# Altium PCB Arduino-DUE-V03.PcbDoc (part 2 of 2)
Units mil, origin at the board's own origin, x right, y up, seen from the top; angles counter-clockwise.
Board outline 4000 x 2100 mil, 2 copper layers (Top, Bottom), stack 65.748 mil thick; 128 components, 163 nets, 632 pads, 387 vias.
Unrouted connection lines stored in the file: 4.
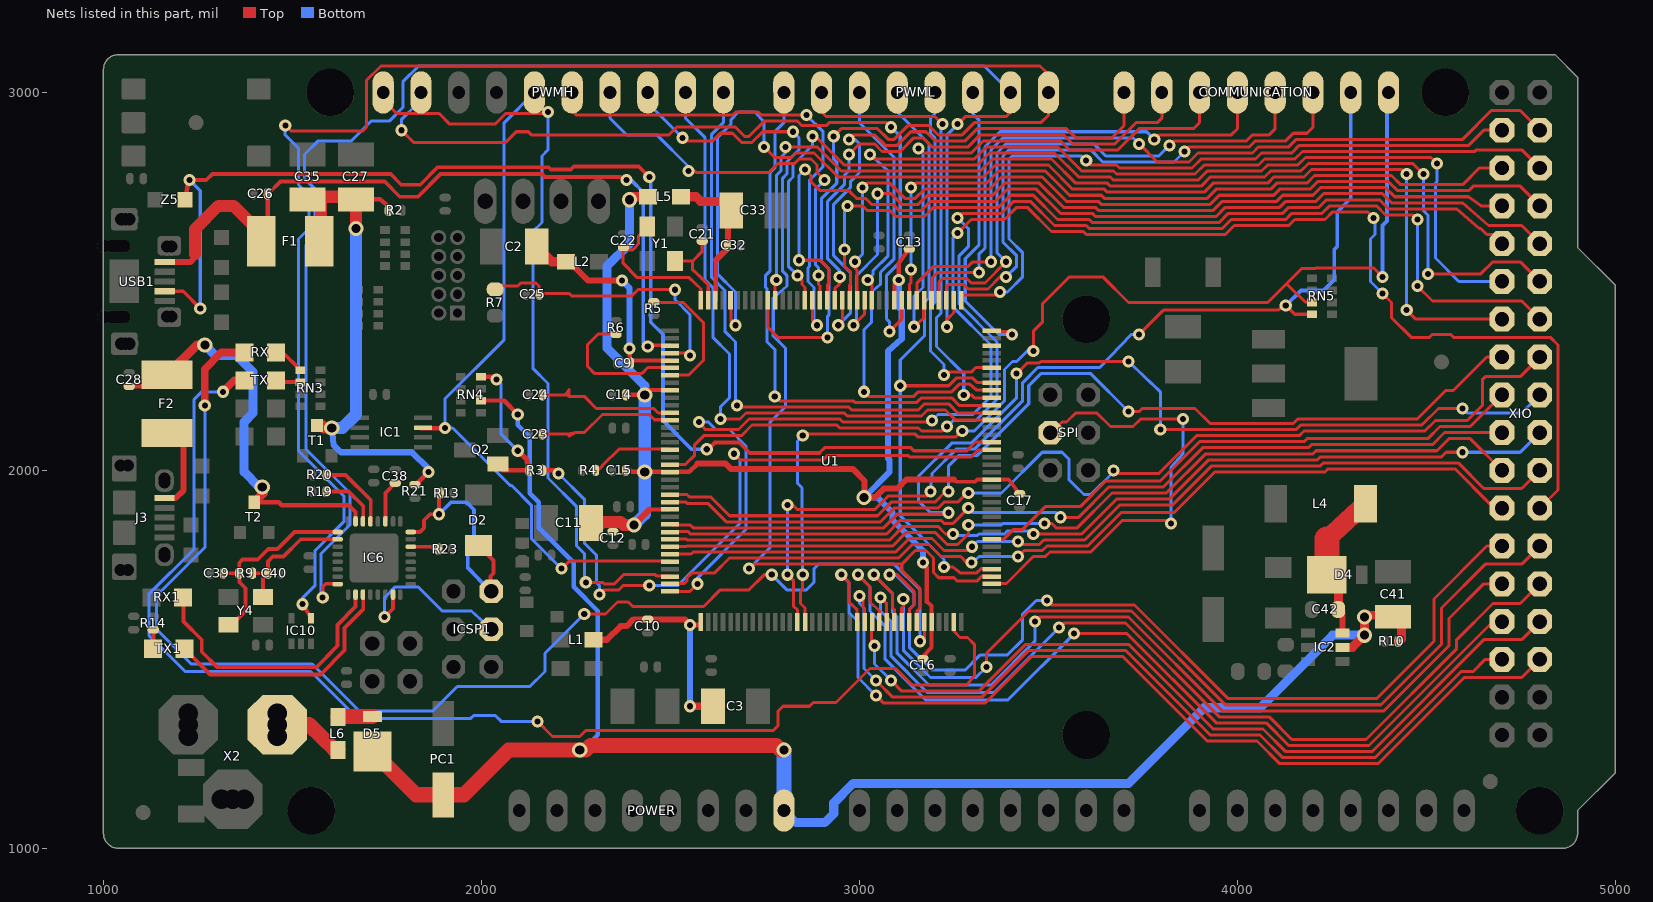
[diagram p2: the nets of this part, all layers, seen from the top]

## Via types
v1: diameter 32/32 (per signal layer), hole 16, Top to Bottom, 323 vias
v2: diameter 40/40 (per signal layer), hole 24, Top to Bottom, 64 vias

## Nets (pads, with @x,y where several pads share a name; then routed paths per layer and width w, separated by ;. In a path a pad name is that pad's centre, name@x,y a point inside that pad or via, vN(x,y) a via of type N, cw(c..) or ccw(c..) an arc to the next point about the centre after c; other vN are vias at no path point) (continued)
N$6: Q2.1 R3.2 RN4.8 | length 417.1
  Top w8: RN4.8@1999,2248 RN4.8@2000,2248
  Top w11: Q2.1@2044,2017 2040,2016 2056,2000 Q2.1@2068,2000
  Top w12: RN4.8@2000,2248 2032,2248 v1(2040,2240) ; Q2.1@2068,2000 2127,2000 R3.2@2128,2000
  Top w14: v1(2096,2052) 2119,2030 R3.2@2127,2000
  Bottom w8: v1(2040,2240) 2052,2228 2052,2096 v1(2096,2052)
N$7: R4.1 U1.53 | length 221.9
  Top w8: R4.1@2302,2000 2308,2000 2320,2012 2320,2014 2364,2056 2496,2056 U1.53@2500,2055
N$10: D5.P$2 L6.1 | length 92.2
  Top w40: L6.1@1620,1348 1622,1349 D5.P$2@1711.98,1349
N$11: R5.2 U1.43 | length 383.2
  Top w8: R5.2@2455.99,2446 R5.2@2447,2444 ; U1.43@2500,2252 2548,2252 2588,2292 2588,2390 2534,2444 R5.2@2447,2444 ; R5.2@2446,2444 R5.2@2447,2444 ; R5.2@2446,2444 R5.2@2447,2444 ; R5.2@2446,2444 R5.2@2447,2444 ; R5.2@2446,2444 R5.2@2447,2444 ; R5.2@2446,2444 R5.2@2447,2444 ; R5.2@2446,2444 R5.2@2447,2444 ; R5.2@2446,2444 R5.2@2447,2444 ; R5.2@2446,2444 R5.2@2447,2444
N$12: R6.2 U1.42 | length 378.9
  Top w8: R6.2@2356,2361 2309,2361 2280,2332 2280,2276 2300,2256 2424,2256 2440,2272 2496,2272 U1.42@2500,2272
N$14: R14.2 TX1.A | length 51.2
  Top w10: TX1.A@1131,1528 1132,1530 R14.2@1132,1579
N$54: RN3.1 RX.A | length 83.7
  Top w10: RX.A@1457,2312 1472,2314 RN3.1@1521,2266
N$55: RN3.2 TX.A | length 52
  Top w10: TX.A@1469,2234 RN3.2@1521,2234
PIN22: U1.1 XIO.3 | length 1885.9
  Top w8: U1.1@3270,2451 3268,2464 3364,2464 v1(3372,2472) ; v1(3600,2820) 3612,2808 3680,2808 3688,2800 3880,2800 3904,2824 4048,2824 4064,2840 4144,2840 4164,2860 4612,2860 4652,2900 XIO.3@4699.97,2900
  Bottom w8: v1(3372,2472) 3392,2472 3432,2512 3432,2576 3396,2612 3396,2824 3404,2832 3588,2832 v1(3600,2820)
PIN23: U1.7 XIO.4 | length 2129.2
  Top w8: U1.7@3152,2451 3152,2456 3152,2495 3197,2540 3288,2540 3300,2552 v1(3348,2552) ; v1(3740,2864) 3788,2816 3872,2816 3896,2840 4040,2840 4056,2856 4136,2856 4156,2876 4596,2876 4672,2952 4748,2952 XIO.4@4799.97,2900
  Bottom w8: v1(3348,2552) 3348,2848 3380,2880 3724,2880 v1(3740,2864)
PIN24: U1.8 XIO.5 | length 1963.7
  Top w8: U1.8@3132,2451 3132,2492 3136,2496 v1(3136,2532) ; v1(3136,2748) 3148,2760 3336,2760 3368,2792 3492,2792 3556,2728 3640,2728 3648,2720 3920,2720 3944,2744 4088,2744 4104,2760 4184,2760 4204,2780 4408,2780 4432,2756 4596,2756 4640,2800 XIO.5@4699.98,2800
  Bottom w8: v1(3136,2532) v1(3136,2748)
PIN25: U1.13 XIO.6 | length 2299.6
  Top w8: v1(3022,2504) 3033,2493 3033,2455 U1.13@3034,2451 ; v1(3028,2836) 3040,2824 3304,2824 3336,2856 3524,2856 3588,2792 3672,2792 3680,2784 3888,2784 3912,2808 4056,2808 4072,2824 4152,2824 4172,2844 4628,2844 4632,2848 4752,2848 XIO.6@4799.98,2800
  Bottom w8: v1(3022,2504) 3036,2518 3036,2528 3076,2568 3076,2792 v1(3028,2836)
PIN26: U1.14 XIO.7 | length 2213.3
  Top w8: v1(2984,2384) 3014,2414 U1.14@3014,2451 ; v1(3048,2732) 3084,2732 3112,2704 3156,2704 3180,2728 3352,2728 3384,2760 3476,2760 3540,2696 3624,2696 3632,2688 3936,2688 3960,2712 4104,2712 4120,2728 4200,2728 4220,2748 4392,2748 4416,2724 4612,2724 4644,2700 XIO.7@4699.98,2700
  Bottom w8: v1(2984,2384) 2992,2392 2992,2515 3048,2571 v1(3048,2732)
PIN27: U1.15 XIO.8 | length 2237
  Top w8: v1(2988,2552) 2988,2535 2994,2530 2994,2451 U1.15@2994,2450 ; v1(3008,2748) 3020,2760 3080,2760 3120,2720 3148,2720 3172,2744 3344,2744 3376,2776 3484,2776 3548,2712 3632,2712 3640,2704 3928,2704 3952,2728 4096,2728 4112,2744 4192,2744 4212,2764 4400,2764 4424,2740 4612,2740 4624,2752 4748,2752 XIO.8@4799.98,2700
  Bottom w8: v1(2988,2552) 3008,2572 v1(3008,2748)
PIN28: U1.16 XIO.9 | length 2132.2
  Top w8: v1(2960,2584) 2960,2540 2977,2524 2976,2520 2976,2492 2974,2490 2974,2449 U1.16@2975,2451 ; v1(2968,2700) 3008,2700 3020,2688 3080,2688 3096,2672 3172,2672 3196,2696 3368,2696 3400,2728 3460,2728 3524,2664 3608,2664 3616,2656 3952,2656 3976,2680 4120,2680 4136,2696 4216,2696 4236,2716 4376,2716 4400,2692 4580,2692 4640,2640 4644,2640 4660,2624 4676,2624 XIO.9@4699.98,2600
  Bottom w8: v1(2960,2584) 2960,2692 v1(2968,2700)
PIN29: U1.19 XIO.10 | length 2547.7
  Top w8: v1(2840,2556) 2896,2556 2920,2532 2920,2496 2916,2492 U1.19@2916,2451 ; v1(2856,2796) 2872,2780 2872,2764 2896,2740 2972,2740 2992,2720 3016,2720 3032,2704 3088,2704 3104,2688 3164,2688 3188,2712 3360,2712 3392,2744 3468,2744 3532,2680 3616,2680 3624,2672 3944,2672 3968,2696 4112,2696 4128,2712 4208,2712 4228,2732 4384,2732 4408,2708 4596,2708 4664,2648 4752,2648 XIO.10@4799.98,2600
  Bottom w8: v1(2840,2556) 2840,2780 v1(2856,2796)
PIN30: U1.22 XIO.11 | length 2698.7
  Top w8: v1(2836,2516) 2848,2504 2848,2492 2856,2484 U1.22@2856,2448 ; v1(2876,2884) 2884,2884 2960,2808 3312,2808 3344,2840 3516,2840 3580,2776 3664,2776 3672,2768 3896,2768 3920,2792 4064,2792 4080,2808 4160,2808 4180,2828 4512,2828 v1(4528,2812) ; U1.22@2856,2448 2857,2451 2857,2449 U1.22@2856,2448
  Bottom w8: v1(2836,2516) 2812,2540 2812,2764 2824,2776 2824,2808 2876,2860 v1(2876,2884) ; v1(4528,2812) 4528,2764 4524,2760 4524,2562 4586,2500 XIO.11@4699.99,2500
PIN31: U1.26 XIO.12 | length 2810
  Top w8: U1.26@2778,2451 2777,2461 2777,2501 v1(2780,2504) ; v1(2804,2856) 2888,2856 2952,2792 3320,2792 3352,2824 3508,2824 3572,2760 3656,2760 3664,2752 3904,2752 3928,2776 4072,2776 4088,2792 4168,2792 4188,2812 4464,2812 v1(4492,2784) ; v1(4504,2520) 4644,2520 4676,2552 4748,2552 XIO.12@4799.99,2500
  Bottom w8: v1(2780,2504) 2780,2780 2792,2792 2792,2828 2804,2840 v1(2804,2856) ; v1(4492,2784) 4492,2688 4504,2676 v1(4504,2520)
PIN32: U1.32 XIO.13 | length 3265.6
  Top w8: U1.32@2660,2451 2660,2397 v1(2672,2384) ; v1(2748,2856) 2776,2828 2820,2828 2832,2840 2880,2840 2944,2776 3328,2776 3360,2808 3500,2808 3564,2744 3648,2744 3656,2736 3912,2736 3936,2760 4080,2760 4096,2776 4176,2776 4196,2796 4436,2796 v1(4448,2784) ; v1(4448,2424) 4472,2400 XIO.13@4699.99,2400 XIO.13@4704,2400
  Bottom w8: v1(2672,2384) 2672,2472 2624,2520 2624,2880 2660,2916 2660,2928 2680,2948 2724,2948 2748,2920 v1(2748,2856) ; v1(4448,2424) v1(4448,2784)
PIN33: U1.55 XIO.14 | length 3348.1
  Top w8: U1.55@2500,2016 2504,2016 2540,2016 2564,2040 2564,2068 2588,2092 2688,2092 2716,2120 2940,2120 2948,2112 3156,2112 3164,2104 3220,2104 v1(3232,2116) ; v1(3260,2668) 3272,2680 3376,2680 3408,2712 3452,2712 3516,2648 3600,2648 3608,2640 3960,2640 3984,2664 4128,2664 4144,2680 4224,2680 4244,2700 4368,2700 4392,2676 4464,2676 v1(4476,2664) ; v1(4476,2488) 4516,2448 4752,2448 XIO.14@4799.99,2400
  Bottom w8: v1(3232,2116) 3248,2132 3308,2132 3364,2188 3364,2340 3264,2440 3264,2568 3288,2592 3288,2640 v1(3260,2668) ; v1(4476,2488) v1(4476,2664)
PIN34: U1.59 XIO.15 | length 2581.2
  Top w8: U1.59@2500,1937 2504,1936 2544,1936 2550,1930 2606,1930 2656,1880 3048,1880 3084,1916 3200,1916 3228,1944 v1(3236,1944) ; v1(3712,2156) 3740,2156 3748,2164 3888,2164 3928,2124 4148,2124 4160,2136 4476,2136 4552,2212 4572,2212 4660,2300 XIO.15@4699.99,2300
  Bottom w8: v1(3236,1944) 3236,2012 3264,2040 3312,2040 3448,2176 3448,2224 3480,2256 3612,2256 v1(3712,2156)
PIN35: U1.60 XIO.16 | length 2676.1
  Top w8: U1.60@2500,1917 2540,1917 2544,1912 2600,1912 2648,1864 3056,1864 3092,1900 3208,1900 3224,1916 3260,1916 3284,1940 v1(3288,1940) ; v1(3672,2000) 3680,1992 3792,1992 3892,2092 4164,2092 4176,2104 4496,2104 4524,2132 4608,2132 4648,2172 4648,2240 4656,2248 4748,2248 XIO.16@4799.99,2300
  Bottom w8: v1(3288,1940) 3376,1940 3484,2048 3536,2048 3554,2030 3554,1976 3575,1955 3594,1936 3612,1936 3672,1996 v1(3672,2000)
PIN36: U1.116 XIO.17 | length 1508.2
  Top w8: U1.116@3351,1819 3351,1818 3354,1818 3382,1818 3408,1844 3432,1844 3492,1904 3584,1904 3652,1972 3796,1972 3900,2076 4176,2076 4184,2084 4504,2084 4536,2116 4616,2116 XIO.17@4700,2200
PIN37: U1.63 XIO.18 | length 2901.1
  Top w8: U1.63@2500,1858 2504,1856 2552,1856 2560,1848 3064,1848 3100,1884 3232,1884 v1(3236,1888) ; v1(3416,2256) 3444,2284 3476,2284 3480,2288 v1(3712,2288) ; v1(3796,2108) 4156,2108 4168,2120 4488,2120 4532,2164 v1(4596,2164)
  Bottom w8: v1(3236,1888) 3188,1888 3156,1920 3156,1984 3244,2072 3296,2072 3416,2192 v1(3416,2256) ; v1(3712,2288) 3796,2208 v1(3796,2108) ; v1(4596,2164) 4608,2152 4752,2152 XIO.18@4800,2200
PIN38: U1.64 XIO.19 | length 2340.3
  Top w8: U1.64@2500,1838 2547,1838 2552,1832 3072,1832 3108,1868 3216,1868 3224,1860 3248,1860 v1(3288,1900) ; v1(3532,1876) 3580,1876 3660,1956 3804,1956 3908,2060 4188,2060 4196,2068 4516,2068 4548,2100 XIO.19@4700,2100
  Bottom w8: v1(3288,1900) 3300,1888 3520,1888 v1(3532,1876)
PIN39: U1.65 XIO.20 | length 2445.8
  Top w8: U1.65@2500,1819 2542,1819 2544,1816 3080,1816 3116,1852 3208,1852 3228,1832 v1(3248,1832) ; v1(3460,1832) 3588,1832 3680,1924 3820,1924 3924,2028 4212,2028 4220,2036 4540,2036 4552,2048 v1(4596,2048)
  Bottom w8: v1(3248,1832) 3252,1832 3256,1828 3312,1828 3316,1832 3384,1832 3392,1840 3452,1840 v1(3460,1832) ; v1(4596,2048) 4748,2048 XIO.20@4800,2100
PIN40: U1.66 XIO.21 | length 2403.4
  Top w8: U1.66@2500,1799 2543,1799 2544,1800 3088,1800 3124,1836 3200,1836 3232,1804 3260,1804 3288,1832 v1(3288,1856) ; v1(3490,1860) 3508,1860 3520,1848 3576,1848 3668,1940 3812,1940 3916,2044 4200,2044 4208,2052 4528,2052 4560,2084 4616,2084 XIO.21@4700.01,2000
  Bottom w8: v1(3288,1856) 3376,1856 3380,1860 v1(3490,1860)
PIN41: U1.67 XIO.22 | length 2481
  Top w8: U1.67@2500,1779 2555,1779 2560,1784 3096,1784 3132,1820 3192,1820 3224,1788 3288,1788 v1(3298,1798) ; v1(3420,1812) 3428,1804 3476,1804 3488,1816 3596,1816 3688,1908 3828,1908 3932,2012 4220,2012 4228,2020 4584,2020 4652,1952 4752,1952 XIO.22@4800.01,2000
  Bottom w8: v1(3298,1798) 3312,1812 v1(3420,1812)
PIN42: U1.71 XIO.23 | length 2412
  Top w8: U1.71@2500,1701 2537,1701 2544,1708 2544,1716 2556,1728 2616,1728 2656,1768 3104,1768 3140,1804 3184,1804 3216,1772 3268,1772 3284,1756 v1(3296,1756) ; v1(3420,1772) 3436,1788 3484,1788 3496,1800 3604,1800 3692,1888 3832,1888 3940,1996 4232,1996 4240,2004 4576,2004 4668,1912 4688,1912 XIO.23@4700.01,1900
  Bottom w8: v1(3296,1756) 3316,1772 v1(3420,1772)
PIN43: U1.72 XIO.24 | length 4370.6
  Top w8: U1.72@2500,1681 2496,1680 2552,1680 v1(2572,1700) ; v1(2576,2128) 2592,2108 2680,2108 2708,2136 2948,2136 2956,2128 3188,2128 v1(3192,2132) ; v1(3260,2628) 3296,2664 3384,2664 3416,2696 3444,2696 3508,2632 3592,2632 3600,2624 3968,2624 3992,2648 4136,2648 4152,2664 4232,2664 4252,2684 4344,2684 v1(4360,2668) ; v1(4384,2468) 4408,2444 4408,2404 4460,2352 4508,2352 4516,2360 4564,2360 4572,2352 4828,2352 4848,2332 4848,1948 XIO.24@4800.01,1900
  Bottom w8: v1(2572,1700) 2572,1716 2700,1844 2700,2064 2656,2108 2620,2108 2600,2128 v1(2576,2128) ; v1(3192,2132) 3208,2148 3300,2148 3348,2196 3348,2332 3248,2432 3248,2616 v1(3260,2628) ; v1(4360,2668) 4364,2664 4364,2624 4352,2612 4352,2500 v1(4384,2468)
PIN44: U1.101 XIO.25 | length 2449.6
  Top w8: v1(3080,1724) 3100,1724 3144,1680 3144,1644 3132,1632 U1.101@3132,1600 ; v1(3496,1656) 3508,1644 3728,1644 3976,1396 4368,1396 4520,1548 4520,1660 4660,1800 XIO.25@4700.01,1800
  Bottom w8: v1(3080,1724) 3096,1724 3144,1676 3144,1644 3132,1632 3132,1532 3192,1472 3280,1472 3320,1512 3392,1512 3432,1552 3432,1620 3468,1656 v1(3496,1656)
PIN45: U1.100 XIO.26 | length 2339.4
  Top w8: U1.100@3113,1600 3112,1600 3112,1636 3116,1640 v1(3116,1660) ; v1(3336,1480) 3336,1516 3448,1628 3720,1628 3968,1380 4380,1380 4540,1540 4540,1636 4656,1752 4752,1752 XIO.26@4800.01,1800
  Bottom w8: v1(3116,1660) 3116,1524 3188,1452 3308,1452 v1(3336,1480)
PIN46: U1.99 XIO.27 | length 2404.7
  Top w8: v1(3038,1724) 3088,1674 3088,1636 3093,1632 U1.99@3093,1600 ; v1(3464,1600) 3476,1612 3712,1612 3960,1364 4388,1364 4560,1536 4560,1608 4652,1700 XIO.27@4700.02,1700
  Bottom w8: v1(3038,1724) 3088,1674 3088,1624 3100,1612 3100,1516 3184,1432 3348,1432 3464,1548 v1(3464,1600)
PIN47: U1.98 XIO.28 | length 2383.5
  Top w8: v1(3056,1664) 3072,1648 3072,1600 U1.98@3073,1600 ; v1(3528,1584) 3540,1596 3704,1596 3952,1348 4084,1348 4144,1288 4340,1288 4580,1528 4580,1552 4676,1648 4748,1648 XIO.28@4800.02,1700
  Bottom w8: v1(3056,1664) 3056,1628 3084,1600 3084,1508 3180,1412 3356,1412 v1(3528,1584)
PIN48: U1.97 XIO.29 | length 2409.8
  Top w8: v1(2996,1724) 3028,1692 3028,1652 3053,1628 U1.97@3053,1600 ; v1(3568,1568) 3708,1568 3944,1332 4076,1332 4136,1272 4348,1272 4676,1600 XIO.29@4700.02,1600
  Bottom w8: v1(2996,1724) 3028,1692 3028,1628 3068,1588 3068,1500 3176,1392 3392,1392 v1(3568,1568)
PIN49: U1.96 XIO.30 | length 2216.9
  Top w8: U1.96@3034,1600 3032,1592 3032,1544 v1(3040,1536) ; v1(3084,1444) 3112,1416 3316,1416 3440,1540 3712,1540 3936,1316 4068,1316 4128,1256 4356,1256 4652,1552 4752,1552 XIO.30@4800.02,1600
  Bottom w8: v1(3040,1536) 3040,1488 v1(3084,1444)
PIN50: U1.95 XIO.31 | length 2266.6
  Top w8: v1(3000,1668) 3010,1659 3010,1639 3013,1635 U1.95@3014,1600 ; v1(3044,1444) 3088,1400 3324,1400 3448,1524 3704,1524 3928,1300 4060,1300 4120,1240 4364,1240 4592,1468 4624,1468 4656,1500 XIO.31@4700.02,1500
  Bottom w8: v1(3000,1668) 3000,1648 3012,1636 3012,1476 v1(3044,1444)
PIN51: U1.94 XIO.32 | length 2548.4
  Top w8: v1(2952,1724) 2972,1704 2972,1652 2994,1631 2994,1600 U1.94@2993,1600 ; v1(3044,1404) 3064,1384 3332,1384 3456,1508 3696,1508 3920,1284 4052,1284 4112,1224 4372,1224 4600,1452 4752,1452 XIO.32@4800.02,1500
  Bottom w8: v1(2952,1724) 2972,1704 2972,1624 2996,1600 2996,1452 v1(3044,1404)
PWM2: PWML.3 U1.144 | length 808.6
  Top w8: U1.144@3351,2370 3344,2368 3396,2368 v1(3404,2360)
  Bottom w8: PWML.3@3300,3004 PWML.3@3300,3000.03 3300,2944 3316,2928 3316,2596 3280,2560 3280,2448 3368,2360 v1(3404,2360)
PWM3: PWML.4 U1.139 | length 913.1
  Top w8: v1(3224,2252) 3232,2260 3296,2260 3308,2272 3344,2272 U1.139@3351,2272
  Bottom w8: PWML.4@3200,3000.01 3200,2944 3188,2932 3188,2892 3200,2880 3200,2444 3188,2432 3188,2316 3224,2280 v1(3224,2252)
PWM5: PWML.6 U1.136 | length 1227.4
  Top w8: v1(3012,2208) 3024,2196 3144,2196 3156,2208 3244,2208 3264,2228 3292,2228 3309,2213 U1.136@3351,2213
  Bottom w8: PWML.6@3000,2999.97 3000,2920 3092,2828 3092,2560 3056,2524 3056,2492 3032,2472 3032,2392 3012,2372 v1(3012,2208)
PWM6: PWML.7 U1.135 | length 1215.5
  Top w8: PWML.7@2900,2999.96 2900,2949 2913,2936 3200,2936 v1(3220,2916) ; v1(3276,2200) 3296,2200 3304,2192 3344,2192 U1.135@3351,2193
  Bottom w8: v1(3220,2916) 3216,2912 3216,2416 3204,2404 3204,2328 3276,2256 v1(3276,2200)
PWM7: PWML.8 U1.134 | length 1429.1
  Top w8: v1(2776,2196) 2788,2184 2984,2184 2988,2180 3152,2180 3164,2192 3244,2192 3264,2172 3348,2172 3349,2173 U1.134@3351,2173
  Bottom w8: v1(2776,2196) 2776,2320 2756,2340 2756,2480 2752,2484 2752,2516 2764,2528 2764,2788 2776,2800 2776,2896 2800,2920 PWML.8@2800,3000
PWM8: PWMH.1 U1.133 | length 1566
  Top w8: v1(2676,2172) 2680,2168 2972,2168 2980,2160 3156,2160 3172,2176 3236,2176 3260,2152 3344,2152 U1.133@3351,2153
  Bottom w8: PWMH.1@2640,3000 2640,2920 2608,2888 2608,2512 2644,2476 2644,2368 2672,2340 2672,2176 v1(2676,2172)
PWM9: PWMH.2 U1.132 | length 1668.9
  Top w8: v1(2632,2136) 2684,2136 2700,2152 2960,2152 2968,2144 3164,2144 3180,2160 3228,2160 3255,2133 3336,2133 3340,2134 U1.132@3351,2134
  Bottom w8: PWMH.2@2540,3000 2540,2932 2592,2880 2592,2504 2612,2484 2612,2352 2656,2308 2656,2192 2632,2168 v1(2632,2136)
PWM11: PWMH.4 U1.20 | length 1084.4
  Top w8: v1(2548,2792) 2564,2792 2568,2788 2760,2788 2784,2812 2828,2812 2840,2824 2872,2824 2888,2808 2888,2788 v1(2908,2768) ; v1(2892,2516) 2892,2492 2896,2488 2896,2456 U1.20@2896,2451
  Bottom w8: PWMH.4@2340,3000.03 2340,2932 2384,2888 2464,2888 2548,2804 v1(2548,2792) ; v1(2892,2516) 2892,2536 2884,2544 2884,2744 v1(2908,2768)
PWM12: PWMH.5 U1.21 | length 1352
  Top w8: PWMH.5@2240,3000.01 2240,2952 2252,2940 2664,2940 2672,2948 2732,2948 2740,2940 v1(2860,2940) ; U1.21@2876,2451 2876,2397 v1(2888,2384)
  Bottom w8: v1(2860,2940) 2904,2896 2904,2804 2868,2768 2868,2540 2864,2536 2864,2500 2880,2484 2880,2392 v1(2888,2384)
PWM13: IC1.3 PWMH.6 U1.68 | length 1865.8
  Top w8: IC1.3@1840,2112 IC1.3@1846,2113 ; v1(2212,1740) 2232,1760 2409,1760 2412,1760 U1.68@2500,1760
  Top w12: IC1.3@1840,2112 v1(1904,2112)
  Bottom w8: PWMH.6@2140,2999.99 2060,2920 2060,2346 1904,2190 v1(1904,2112) 1924,2112 2076,1960 2080,1960 2132,1908 2132,1820 v1(2212,1740)
RD+: IC6.29 R20.1 | length 201
  Top w10: R20.1@1590,1988 1640,1988 1707,1922 IC6.29@1707,1865
RD-: IC6.30 R19.1 | length 156.3
  Top w10: R19.1@1590,1944 1590,1946 1592,1944 1648,1944 1687,1906 IC6.30@1687,1865
RESET2: D2.A IC6.24 ICSP1.5 R13.1 | length 670.3
  Top w10: IC6.24@1813,1837 1837,1837 1848,1848 1848,1868 1864,1884 v1(1888,1884) 1888,1939 R13.1@1891,1940 ; D2.A@1992,1802 2032,1762 2032,1728 2024,1720 2024,1680 ICSP1.5@2025.97,1680.02
  Bottom w10: v1(1888,1884) 1920,1916 1960,1916 1980,1896 1980,1816 1964,1800 1964,1742 ICSP1.5@2020,1684 ; ICSP1.5@2022,1682 ICSP1.5@2025.97,1680.02
  Bottom w12: ICSP1.5@2020,1684 ICSP1.5@2022,1682
RESET_CMD: IC6.22 R23.1 | length 74.8
  Top w10: IC6.22@1813,1798 1865,1798 R23.1@1887,1792
RX: IC10.4 PWML.1 U1.27 | length 5170.3
  Top w8: v1(1481,2913) 1496,2898 1686,2898 1696,2908 1696,3032 1734,3070 3478,3070 3500,3048 3500,3000 3500,2940 3480,2920 3304,2920 3272,2888 3208,2888 3184,2912 3128,2912 3092,2876 3076,2876 3048,2904 2952,2904 v1(2932,2884) ; U1.27@2758,2451 2758,2379 2784,2352 v1(2916,2352)
  Top w10: v1(1527,1646) 1550,1609 IC10.4@1548,1609
  Bottom w8: v1(1481,2913) 1480,2913 1480,2888 1516,2852 1516,2756 1544,2728 1544,2640 1516,2612 1516,2052 1636,1932 1636,1864 1560,1788 1560,1696 1527,1663 v1(1527,1646) ; v1(2916,2352) 2916,2408 2920,2412 2920,2532 2900,2552 2900,2720 2940,2760 2940,2816 2932,2824 v1(2932,2884)
RXD0: COMMUNICATION.2 U1.18 | length 1418.9
  Top w8: U1.18@2935,2451 2935,2481 2948,2494 v1(2948,2512) ; v1(2972,2836) 3000,2864 3040,2864 3060,2844 3108,2844 3144,2880 3168,2880 3192,2856 3288,2856 3320,2888 3540,2888 3564,2864 3676,2864 3732,2920 3788,2920 3800,2932 COMMUNICATION.2@3800,3000
  Bottom w8: v1(2948,2512) 2948,2528 2916,2560 2916,2712 2960,2756 2960,2780 2972,2792 v1(2972,2836)
RXD1: COMMUNICATION.4 U1.5 | length 1327.1
  Top w8: U1.5@3191,2451 3192,2456 3192,2509 3208,2524 v1(3316,2524) ; v1(3780,2876) 3792,2888 3984,2888 4000,2904 COMMUNICATION.4@4000,3000
  Bottom w8: v1(3316,2524) 3316,2572 3332,2588 3332,2856 3372,2896 3760,2896 v1(3780,2876)
RXD2: COMMUNICATION.6 U1.3 | length 1529.8
  Top w8: U1.3@3231,2451 3231,2487 3236,2492 3276,2492 3288,2480 3340,2480 3372,2512 v1(3388,2512) ; v1(3860,2844) 3872,2856 4032,2856 4048,2872 4128,2872 4148,2892 4184,2892 4200,2908 COMMUNICATION.6@4200,3000
  Bottom w8: v1(3388,2512) 3416,2540 3416,2568 3380,2604 3380,2832 3396,2848 3612,2848 3644,2816 3832,2816 v1(3860,2844)
RXL: RX.C U1.103 | length 3450.3
  Top w8: v1(2272,1620) 2328,1620 2360,1652 2388,1652 2400,1640 2588,1640 2632,1684 2708,1684 2748,1724 v1(2768,1724) ; v1(3160,1548) 3172,1556 U1.103@3172,1600
  Top w20: v1(1268,2172) 1268,2268 1312,2312 RX.C@1374,2312
  Bottom w8: v1(1268,2172) 1268,1796 1140,1668 1140,1580 1232,1488 1552,1488 1676,1364 1872,1364 1936,1428 2128,1428 2168,1468 2168,1516 v1(2272,1620) ; v1(2768,1724) 2808,1684 2860,1684 2880,1704 2880,1740 2892,1752 3092,1752 3160,1684 v1(3160,1548)
RXL-U2: IC6.10 RX1.C | length 719
  Top w10: RX1.C@1210,1664 1212,1650 1212,1600 1260,1552 1260,1520 1300,1480 1564,1480 1591,1507 1591,1508 1619,1536 1619,1591 1667,1640 IC6.10@1667,1672
SCK2: IC6.15 ICSP1.3 | length 460
  Top w10: v1(1744,1612) 1766,1634 IC6.15@1766,1672
  Bottom w8: v1(1744,1612) 1744,1664 1772,1692 1832,1692 1896,1628 1974,1628 ICSP1.3@2026,1580.02
SCL0-3: COMMUNICATION.8 RN5.7 U1.87 | length 2991.3
  Top w8: v1(2850,1724) 2850,1686 2844,1680 2844,1648 2856,1636 2856,1600 U1.87@2857,1600 ; v1(2850,2092) 2854,2096 3148,2096 3156,2088 3254,2088 v1(3272,2104) ; v1(3460,2316) 3460,2368 3484,2392 3484,2440 3556,2512 3644,2512 3712,2444 4080,2444 4130,2494 ; RN5.7@4198,2445 4180,2445 4130,2494 ; v1(4384,2512) 4360,2536 4208,2536 4206,2534 4170,2534 4130,2494
  Bottom w8: v1(2850,1724) 2848,1954 2836,1966 2836,2078 v1(2850,2092) ; v1(3272,2104) 3304,2104 3384,2184 3384,2267 3405,2288 3416,2288 3444,2316 v1(3460,2316)
  Bottom w10: v1(4384,2512) 4384,2648 4396,2660 4396,2996 COMMUNICATION.8@4400,3000
SCL1: PWMH.10 U1.70 | length 2055.6
  Top w8: PWMH.10@1740,3000 1740,2980 1776,2944 1888,2944 1916,2916 2036,2916 2064,2944 2172,2944 v1(2176,2948) ; v1(2276,1704) 2320,1704 2324,1700 2352,1700 2376,1724 2460,1724 2464,1720 2500,1720 U1.70@2496,1720
  Bottom w8: v1(2176,2948) 2176,2848 2160,2832 2160,2656 2136,2632 2136,2270 2176,2230 2176,1980 2252,1904 2252,1800 2272,1780 2272,1708 v1(2276,1704)
SDA0-3: COMMUNICATION.7 RN5.8 U1.86 | length 2675
  Top w8: v1(2810,1724) 2826,1708 2826,1640 2836,1631 U1.86@2836,1604 ; v1(2810,1908) 2824,1908 2836,1896 3040,1896 3076,1932 3180,1932 v1(3188,1944) ; U1.86@2837,1600 U1.86@2836,1604 ; U1.86@2838,1600 U1.86@2836,1604 ; v1(3740,2360) 3804,2424 4108,2424 4120,2436 v1(4128,2436)
  Top w10: v1(4128,2436) 4152,2413 RN5.8@4198,2413
  Bottom w8: v1(2810,1724) v1(2810,1908) ; v1(3188,1944) 3192,1992 3256,2056 3304,2056 3432,2184 3432,2232 3472,2272 3636,2272 3720,2360 v1(3740,2360)
  Bottom w10: v1(4128,2436) 4168,2476 4228,2476 4256,2504 4256,2584 4264,2592 4264,2684 4300,2720 COMMUNICATION.7@4300,3000
SDA1: PWMH.9 U1.9 | length 2160
  Top w8: v1(1788,2900) 1820,2868 2064,2868 2092,2896 2124,2896 2132,2888 2496,2888 2516,2908 2672,2908 2696,2884 2708,2884 2748,2924 2836,2924 2848,2912 2912,2912 2920,2920 3072,2920 v1(3084,2908) ; v1(3080,2368) 3112,2400 3112,2448 U1.9@3113,2451
  Bottom w8: v1(1788,2900) 1788,2928 1828,2968 1828,2992 1832,2996 PWMH.9@1840,3000 ; v1(3080,2368) 3080,2392 3072,2400 3072,2516 3108,2552 3108,2884 v1(3084,2908)
SPCK: SPI.3 U1.110 | length 1228.6
  Top w8: U1.110@3351,1701 3389,1701 3460,1772 3492,1772 3504,1784 3612,1784 3696,1868 3816,1868 v1(3824,1860) ; SPI.3@3505,2100 3536,2128 3548,2128 3572,2152 3628,2152 3664,2116 3724,2116 3744,2136 v1(3856,2136)
  Bottom w8: v1(3824,1860) 3824,2008 3856,2044 v1(3856,2136)
SS0/PWM10: PWMH.3 U1.102 U1.111 | length 2638.3
  Top w8: v1(2532,2880) 2536,2872 2612,2872 2632,2892 2664,2892 2688,2868 2716,2868 2744,2896 v1(2824,2896) ; v1(2708,1740) 2720,1752 3112,1752 ; U1.102@3152,1600 3152,1628 3160,1636 3160,1688 3112,1736 3112,1752 ; U1.111@3351,1720 3344,1720 3324,1720 3312,1708 3258,1708 3250,1716 3210,1716 3196,1730 3196,1768 3176,1788 3148,1788 3112,1752
  Bottom w8: PWMH.3@2440,3000.04 2440,2972 v1(2532,2880) ; v1(2708,1740) 2764,1796 2764,2128 2804,2168 2804,2324 2772,2356 2772,2456 2808,2488 2808,2516 2796,2528 2796,2772 2808,2784 2808,2816 2840,2848 2840,2880 v1(2824,2896)
SS1/PWM4: PWML.5 U1.112 U1.137 | length 1766.2
  Top w8: v1(3108,2224) 3236,2224 3256,2244 3300,2244 3312,2232 3344,2232 U1.137@3351,2232 ; v1(3224,1744) 3248,1744 3268,1728 3309,1728 3322,1740 U1.112@3351,1740
  Bottom w8: PWML.5@3100,2999.99 3104,3000 3104,2944 3184,2864 3184,2456 3172,2444 3172,2356 3108,2292 v1(3108,2224) 3108,1880 3224,1764 v1(3224,1744)
SS3: U1.142
SW: C42.2 D4.P$1 IC2.6 L4.P$1 | length 410.5
  Top w16: D4.P$1@4237,1724 D4.P$1@4267,1706 ; C42.2@4267,1632 4278,1626 IC2.6@4278,1570
  Top w24: C42.2@4267,1632 D4.P$1@4267,1706
  Top w50: 4237,1819 L4.P$1@4339,1912
  Top w66: D4.P$1@4237,1724 4237,1819
TX: IC6.8 PWML.2 U1.2 | length 4211.1
  Top w8: v1(3232,2380) 3232,2383 3232,2400 3250,2418 U1.2@3250,2451 ; v1(3260,2916) 3280,2936 3388,2936 3400,2948 PWML.2@3400,3000.04
  Top w10: v1(1580,1664) 1580,1692 1588,1700 IC6.8@1620,1700
  Bottom w8: v1(1580,1664) 1576,1668 1576,1780 1652,1856 1652,1940 1536,2056 1536,2596 1560,2620 1560,2744 1532,2772 1532,2836 1568,2872 1656,2872 1708,2924 1756,2924 1792,2960 1792,3028 1834,3070 3330,3070 PWML.2@3400,3000.04 ; v1(3232,2380) 3232,2888 v1(3260,2916)
TXD0: COMMUNICATION.1 U1.17 | length 1538.4
  Top w8: v1(2944,2384) 2955,2394 U1.17@2955,2451 ; v1(2972,2876) 2984,2888 3040,2888 3068,2860 3100,2860 3136,2896 3176,2896 3200,2872 3280,2872 3312,2904 3548,2904 3572,2880 3668,2880 3700,2912 COMMUNICATION.1@3700,3000
  Bottom w8: v1(2944,2384) 2976,2416 2976,2524 2932,2568 2932,2704 2976,2748 2976,2764 3000,2788 3000,2864 2988,2876 v1(2972,2876)
TXD1: COMMUNICATION.3 U1.6 | length 1453.4
  Top w8: v1(3144,2380) 3170,2402 3170,2450 3171,2451 U1.6@3172,2451 ; v1(3156,2852) 3168,2840 3296,2840 3328,2872 3532,2872 3556,2848 3684,2848 3740,2904 3884,2904 3900,2920 COMMUNICATION.3@3900,3000
  Bottom w8: v1(3144,2380) 3144,2460 3168,2484 3168,2840 v1(3156,2852)
TXD2: COMMUNICATION.5 U1.4 | length 1439.9
  Top w8: U1.4@3211,2451 3211,2499 3220,2508 3284,2508 3296,2496 3332,2496 v1(3388,2552) ; v1(3820,2860) 3832,2872 4024,2872 4040,2888 4084,2888 4100,2904 COMMUNICATION.5@4100,3000
  Bottom w8: v1(3388,2552) 3364,2576 3364,2840 3388,2864 3620,2864 3652,2832 3792,2832 v1(3820,2860)
TXL: TX.C U1.107 | length 3434.1
  Top w8: v1(2148,1336) 2188,1296 2260,1296 2276,1312 2772,1312 2784,1324 2784,1362 2798,1376 2868,1376 2878,1386 2938,1386 3028,1476 3096,1476 3140,1432 3284,1432 3304,1456 3304,1540 3286,1558 3266,1558 3250,1575 U1.107@3250,1600
  Top w20: v1(1316,2208) 1346,2238 TX.C@1374,2238
  Bottom w8: v1(1316,2208) 1260,2208 1240,2188 1240,1792 1120,1672 1120,1564 1216,1468 1548,1468 1672,1344 1972,1344 1980,1352 2036,1352 2052,1336 v1(2148,1336)
TXL-U2: IC6.11 TX1.C | length 647.3
  Top w10: TX1.C@1214,1528 1282,1460 1575,1460 1638,1524 1638,1583 1687,1632 IC6.11@1687,1672
UOTGID: U1.129 USB1.4 Z5.2 | length 3402
  Top w8: 2894,2046 2908,2060 3136,2060 3144,2052 3284,2052 3307,2075 U1.129@3351,2075
  Top w10: USB1.4@1160,2474 1172,2474 1211,2474 v1(1256,2428) ; USB1.4@1162,2475 USB1.4@1173,2475 ; v1(1228,2768) 1272,2768 1288,2784 1760,2784 1788,2756 1838,2756 1884,2802 2178,2802 2184,2796 2236,2796 2244,2804 2416,2804 v1(2444,2776) ; v1(2596,2056) 2600,2056 2618,2074 2682,2074 2710,2046 2894,2046
  Top w12: Z5.2@1216,2716 1224,2764 v1(1228,2768)
  Bottom w10: v1(1228,2768) 1256,2740 v1(1256,2428) ; v1(2444,2776) 2448,2772 2448,2392 2480,2360 2480,2132 2556,2056 v1(2596,2056)
UOTGVBOF: R3.1 U1.128 | length 1754.3
  Top w8: v1(2312,1672) 2324,1684 2364,1684 2376,1696 v1(2444,1696) ; v1(2668,2044) 2684,2028 2904,2028 2916,2040 3128,2040 3132,2036 3296,2036 3314,2054 3342,2054 U1.128@3351,2055
  Top w12: R3.1@2162,2000 2196,2000 v1(2204,1992)
  Bottom w8: v1(2204,1992) 2272,1924 2272,1808 2304,1776 2304,1704 2312,1696 v1(2312,1672) ; v1(2444,1696) 2520,1696 2684,1860 2684,2028 v1(2668,2044)
USBVCC: C27.+ C35.+ F1.1 R2.2 R21.2 T1.1 | length 1445.1
  Top w12: C27.+@1668,2717 1732,2717 1755,2698 R2.2@1755,2688 ; R21.2@1823.99,1962 1834,1970 v1(1860,1996)
  Top w16: C35.+@1540,2717 C35.+@1540,2725
  Top w30: T1.1@1564.99,2119 1566,2120 1576,2120 1584,2112 v2(1604,2112)
  Top w32: C35.+@1540,2717 1553,2725 1568,2724 C35.+@1576,2724 ; F1.1@1571,2606 1576,2614 C35.+@1576,2724 ; C27.+@1664,2721 C27.+@1668,2717 ; v2(1668,2640) C27.+@1668,2717 ; C35.+@1576,2724 1668,2724 C27.+@1668,2717
  Bottom w16: v2(1604,2112) 1608,2068 1628,2048 1816,2048 1860,2004 v1(1860,1996)
  Bottom w32: v2(1604,2112) 1632,2112 1668,2148 v2(1668,2640)
USBVCCU2: C28.1 F2.1 IC6.31 T2.1 | length 1095.9
  Top w10: 1648,1908 1667,1890 IC6.31@1667,1865
  Top w12: C28.1@1068,2223 1138,2223 F2.1@1168,2253 ; T2.1@1398.99,1916 1464,1916 1472,1908 1648,1908
  Top w24: F2.1@1168,2253 1248,2332 v2(1268,2332) ; T2.1@1398.99,1916 1423,1940 1423,1953 v2(1420,1956)
  Bottom w24: v2(1268,2332) 1296,2304 1352,2304 1396,2260 1396,2152 1372,2128 1372,1996 1412,1956 v2(1420,1956)
VBG: C25.1 R7.2 U1.40 | length 762
  Top w8: R7.2@2035.99,2479 2043,2479 2052,2488 2096,2488 2104,2496 2144,2496 2152,2488 2152,2468 2154,2466 2164,2468 2232,2468 2238,2462 2398,2462 2414,2478 v1(2512,2478) ; U1.40@2500,2311 2505,2311 2545,2311 v1(2552,2304)
  Bottom w8: v1(2512,2478) 2512,2452 2552,2412 v1(2552,2304)
VDDANA: C3.+ C10.2 L1.2 U1.73 | length 597.9
  Top w8: U1.73@2580,1591 U1.73@2581,1600
  Top w12: v1(2552,1591) U1.73@2580,1591
  Top w16: L1.2@2296,1552 2332,1552 2368,1588 2384,1588 2402,1606 C10.2@2439.99,1606 2538,1606 v1(2552,1591)
  Top w20: v1(2552,1376) C3.+@2613,1376
  Bottom w16: v1(2552,1376) v1(2552,1591)
VDDOUT: C11.+ C12.2 C13.2 C14.2 C15.2 C16.2 C17.2 L5.1 U1.10 U1.45 U1.56 U1.61 U1.104 U1.124 | length 3970.6
  Top w8: C11.+@2280,1880 2283,1878 C11.+@2291,1861 ; C11.+@2288,1848 C11.+@2296,1856 ; C15.2@2382,2000 2392,2000 ; C14.2@2382,2200 2392,2200 ; L5.1@2432,2724 L5.1@2441,2724 ; U1.61@2496,1897 2500,1898 U1.61@2504,1896 ; C16.2@3158,1508 C16.2@3167.99,1502 ; U1.124@3344,1976 U1.124@3351,1976 ; C17.2@3424,1936 C17.2@3423.99,1938
  Top w10: C12.2@2347.99,1838 2350,1854 2376,1856 ; 3250,1976 3252,1972 3258,1970 3306,1970 3312,1976 U1.124@3344,1976 ; U1.124@3351,1976 3394,1976 C17.2@3423.99,1938
  Top w11: C15.2@2382,2000 2396,2000 2396,1996 ; 2444,1896 2441,1897 U1.61@2496,1897 ; v2@2444,2213 U1.45@2500,2213 ; U1.10@3093,2451 3093,2493 v1(3104,2504) ; C16.2@3167.99,1502 3168,1508 3191,1531 3191,1600 3191,1642 3178,1652
  Top w12: 2392,2200 v2(2432,2200) v2@2444,2213 ; 2396,1996 v2(2432,1996) 2437,1996 2500,1996 2550,1996 2572,2018 ; v1(3104,2504) 3104,2548 C13.2@3132,2587 ; v1(3168,1756) 3178,1742 3178,1652
  Top w16: v2(2404,1856) 2444,1896 ; 2572,2018 2646,2018 2660,2004 2982,2004 3014,1972 3014,1926 v2(3012,1928) 3040,1928 3064,1952 3100,1952 3124,1976 3250,1976
  Top w24: v2(2392,2716) 2394,2724 2432,2724 L5.1@2432,2726
  Top w32: C11.+@2280,1880 2280,1856 2296,1856 2312,1856 2320,1864 2368,1864 2376,1856 v2(2404,1856)
  Bottom w16: v1(3104,2504) 3104,2432 3112,2424 3112,2348 3076,2316 3076,2032 3080,2028 3080,1996 v2(3012,1928) 3048,1928 3088,1888 3088,1868 3168,1788 v1(3168,1756)
  Bottom w24: v2(2392,2716) 2392,2600 2332,2540 2332,2324 2432,2224 v2(2432,2200)
  Bottom w32: v2(2404,1856) 2432,1884 v2(2432,1996) v2(2432,2200)
VDDOUTMI: C2.+ C9.2 L2.2 U1.41 | length 627.9
  Top w8: C2.+@2144,2568 2147,2566 C2.+@2147,2592 ; L2.2@2225,2552 L2.2@2232,2552
  Top w10: C9.2@2394,2284 2392,2288 2392,2291 C9.2@2394,2291
  Top w11: C9.2@2394,2291 U1.41@2500,2291
  Top w12: v1(2392,2322) 2392,2292 C9.2@2394,2291
  Top w16: L2.2@2232,2552 2282,2502 v1(2372,2502)
  Top w24: C2.+@2147,2592 2187,2552 L2.2@2225,2552
  Bottom w16: v1(2372,2502) 2392,2482 v1(2392,2322)
VDDPLL: C32.2 C33.+ L5.2 U1.34 | length 463.1
  Top w8: L5.2@2520,2724 L5.2@2528,2724 ; C33.+@2652,2680 C33.+@2664,2696 ; C33.+@2661,2688 C33.+@2664,2696 ; C33.+@2664,2720 2664,2704 C33.+@2664,2696
  Top w11: U1.34@2620,2451 2620,2556
  Top w16: 2620,2556 C32.2@2652,2588 ; C32.2@2651,2596 C32.2@2652,2588 ; C33.+@2652,2680 C32.2@2652,2588
  Top w24: L5.2@2520,2724 2568,2724 2580,2712 2656,2712 C33.+@2664,2704
VIN: C41.+ D5.P$1 IC2.5 PC1.+ POWER.8 R10.1 RN4.6 | length 4515.6
  Top w12: RN4.6@1999,2185 2060,2184 v1(2096,2148)
  Top w16: v2(4336,1612) v2@4345,1617
  Top w24: IC2.5@4278,1532 4304,1532 v2(4336,1564) v2(4336,1612) ; v2@4345,1617 4412,1613 4434,1592 4434,1554 4428,1548 R10.1@4426,1548
  Top w40: D5.P$1@1712,1257 1827,1142 1899,1142 1954,1142 2072,1260 v2(2260,1260) ; v2@2264,1260 v2(2260,1260) ; v2(2800,1260) 2792,1260 2780,1272 2288,1272 2276,1260 v2(2260,1260)
  Bottom w12: v1(2096,2148) 2096,2120 2128,2088 2128,1940 2152,1916 2152,1848 2244,1756 2244,1692 2308,1628 2308,1300 2284,1276 v2(2260,1260)
  Bottom w24: POWER.8@2800,1100 2832,1068 2908,1068 2932,1092 2932,1120 2984,1172 3712,1172 3912,1372 4060,1372 4252,1564 v2(4336,1564)
  Bottom w40: POWER.8@2800,1100 v2(2800,1260)
VIN+: L6.2 X2.2 | length 187.9
  Top w40: X2.2@1460,1327 1461,1328 1544,1328 1612,1261 L6.2@1620,1261
VUCAP: C38.1 IC6.27 | length 112.5
  Top w10: IC6.27@1746,1865 1746,1940 C38.1@1772,1967
XIN: C22.1 U1.36 Y1.1 | length 438.7
  Top w8: C22.1@2376,2591 C22.1@2375,2583 ; Y1.1@2428,2628 Y1.1@2436,2644 ; U1.36@2581,2451 2581,2480 2550,2510 2412,2510 2375,2548 C22.1@2375,2583 ; C22.1@2375,2583 2400,2583 2416,2600 2416,2620 Y1.1@2439,2646 ; Y1.1@2436,2644 Y1.1@2439,2646 ; Y1.1@2436,2644 2440,2648 Y1.1@2439,2646
XIN32: C24.1 U1.48 | length 392.4
  Top w8: C24.1@2162,2200 2222,2200 ; U1.48@2500,2153 2496,2152 2468,2152 2456,2164 2304,2164 2272,2196 2231,2196 ; 2222,2200 2231,2196 ; 2222,2200 2232,2214 2231,2196
XOUT: C21.1 U1.35 Y1.3 | length 247.2
  Top w8: Y1.3@2512,2552 2512,2555 2512,2560 Y1.3@2512,2554 2558,2554 ; C21.1@2584,2607 2584,2608 2584,2580 2559,2554 2558,2554 ; U1.35@2601,2451 2600,2456 2600,2491 2575,2516 2574,2516 2558,2532 2558,2554
XOUT32: C23.1 U1.49 | length 387.9
  Top w8: C23.1@2162,2096 2230,2096 ; U1.49@2500,2134 2496,2134 2458,2134 2444,2148 2320,2148 2272,2100 2248,2100 ; 2230,2096 2248,2100 ; 2230,2096 2232,2091 2248,2100
XT1: C39.1 IC6.1 R9.1 Y4.1 | length 529.9
  Top w10: C39.1@1318,1728 R9.1@1359,1728 ; Y4.1@1331,1592 1340,1592 1376,1628 1376,1688 1360,1704 1360,1727 R9.1@1359,1728 ; IC6.1@1620,1837 1505,1837 1460,1792 1436,1792 1408,1764 1368,1764 1359,1755 R9.1@1359,1728
XT2: C40.1 IC6.2 R9.2 Y4.3 | length 353.4
  Top w10: R9.2@1396,1731 R9.2@1394,1728 C40.1@1435,1728 ; Y4.3@1422,1665 1422,1715 C40.1@1435,1728 ; IC6.2@1620,1818 1522,1818 1476,1772 1448,1772 1435,1759 C40.1@1435,1728
XUSB: C26.1 F1.2 U1.39 USB1.1@1162,2551.18 | length 2096.6
  Top w10: USB1.1@1162,2552 USB1.1@1175,2552 ; C26.1@1434,2732 1436,2732 1468,2764 1744,2764 1784,2724 1832,2724 1892,2784 2160,2784 2168,2776 2368,2776 2380,2768 v1(2384,2768) ; v1(2440,2328) 2442,2331 U1.39@2500,2331
  Top w12: F1.2@1418,2606 1434,2643 C26.1@1434,2732
  Top w16: USB1.1@1175,2551 1176,2551 1230,2551 1242,2565 1242,2573
  Top w32: 1242,2573 1242,2638 1304,2700 1344,2700 1396,2648 1396,2608 F1.2@1418,2606
  Bottom w10: v1(2384,2768) 2396,2768 2428,2736 2428,2336 2436,2328 v1(2440,2328)
XVCC: F2.2 J3.P1 | length 255.7
  Top w16: J3.P1@1161,1927 1191,1927 1212,1948 1212,2100 F2.2@1168,2100
pads on no net: FID1.P$1 FID2.P$1 FID3.P$1 FID4.P$1 IC6.5 IC6.6 IC6.7 IC6.12 IC6.14 IC6.25 J3.P4 JTAG.7 POWER.1 R99.P$1 R99.P$2 RN5.3 RN5.4 RN5.5 RN5.6 U1.50 U1.69 U1.93 U1.117 U1.131 U1.138 U1.141 U1.143 USB1.1@999.88,2593.5 USB1.1@999.89,2406 USB1.1@1023.5,2593.5 USB1.1@1023.51,2406 USB1.1@1039.25,2593.5 USB1.1@1039.26,2406 USB1.1@1055,2406 USB1.1@1055,2593.5 X2.4 X2.5 X2.6 X2.7 X2.8 X2.9
copper on no net: | length 1060.2
  Top w10: 1172,2474 cw(c1173.71,2473.29) 1173,2475 ; 1175,2552 ccw(c1176.71,2552.71) 1176,2551 ; 1331,2536 cw(c1321.14,2509.45) 1347,2521 ; 1336,2472 cw(c1335,2453) 1354,2452 ccw(c1368,2446) 1362,2432 ccw(c1367,2445) 1380,2440 cw(c1398,2440) 1398,2458 cw(c1395,2443) 1410,2440 ; 1354,2510 ccw(c1410.96,2558.92) 1406,2484 cw(c1414.02,2283.68) 1550,2431 ; 1410,2430 ccw(c1422,2428) 1420,2416 ccw(c1420,2434) 1438,2434 cw(c1453,2433) 1454,2448 cw(c1450,2432) 1466,2428 ccw(c1482,2420) 1474,2404 ccw(c1478,2422) 1496,2418 cw(c1509.5,2397.79) 1523,2418 ; 1457,2238 cw(c1461,2230) 1469,2234 ; 1622,2359 ccw(c1665.85,2393.16) 1659,2338 ; 1623,2318 ccw(c1640.56,2333.12) 1639,2310 ; 1790,2338 ccw(c1791.59,2348.66) 1798,2340 cw(c1804.21,2328.43) 1808,2341 ; 1806,2310 ccw(c1809.59,2325.49) 1818,2312 ; 1826,2312 cw(c1829.21,2307.67) 1830,2313 ; 2039,2341 ccw(c2040.64,2375.68) 2064,2350 ; 2059,2313 ccw(c2055.51,2345.56) 2081,2325 ; 2124,2410 cw(c2141.45,2391.77) 2142,2417 ; 2133,2377 cw(c2145.04,2365.01) 2145,2382 ; 2166,2417 ccw(c2166.17,2441.5) 2181,2422 ; 2180,2382 ccw(c2179.88,2391.95) 2187,2385 cw(c2201.95,2372.81) 2200,2392 ; 2185,2425 cw(c2198.87,2403.53) 2201,2429 ; 2216,2392 cw(c2218,2382) 2228,2384 ccw(c2234,2386) 2236,2380 ; 2252,2380 ccw(c2256,2392) 2268,2388 cw(c2280,2384) 2284,2396 ; 2370,2396 cw(c2370.05,2371.98) 2387,2389 ; 2383,2429 cw(c2383.73,2405.98) 2402,2420 ccw(c2421.77,2436.94) 2424,2411 ; 2390,2384 ccw(c2401.66,2384.83) 2394,2376 ; 2400,2375 ccw(c2397.45,2408.77) 2406,2376 ; 2412,2376 cw(c2412.4,2359.87) 2418,2375 ; 2506,2410 cw(c2507.84,2378.24) 2529,2402 ; 2531,2350 ccw(c2532.09,2359.45) 2538,2352 ; 2539,2392 cw(c2520.57,2371.64) 2548,2373 ; 2547,2363 ccw(c2540.26,2367.21) 2548,2369 ; 2468,2371 ccw(c2469.71,2371.71) 2469,2370 cw(c2469.71,2371.71) 2468,2371
  Top w16: 1172,2412 ccw(c1171.5,2419.5) 1179,2420
  Top w32: 1168,2409 ccw(c1168.5,2412.5) 1172,2412
  Top w40: 1174,2406 ccw(c1175.5,2410.5) 1180,2409 ; 1174,2595 cw(c1175.5,2590.5) 1180,2592 ; 1180,2591 ccw(c1183.5,2591.5) 1184,2588

## Polygon pours and split planes (outlines as drawn)
+5V on Top "Top-+5V" (solid, remove dead copper, pour order 0): 4129.66,1952 3970.34,1952 3880,1861.66 3880,1734.34 3890.34,1724 4148,1724 4148,1933.66
GND on Top "Top-GND" (solid, remove dead copper, pour order 4): 5023,3123 5023,977 957,977 957,3080.02 cw(c1000.31,3079.69) 999.98,3123
VIN on Top "Top-VIN" (solid, remove dead copper, pour order 8): 4457.66,1656 4346.34,1656 4308,1617.66 4308,1532 4349.66,1532 4360,1542.34 4360,1566.34 4369.66,1576 4453.66,1576 4464,1586.34 4464,1649.66
+3V3 on Top "Top-+3V3" (solid, remove dead copper, pour order 12): 3808,2224 3808,2288 4134.24,2288 4226.24,2388 4405.66,2388 4472,2321.66 4472,2166.13 4445.48,2144.02 4212.03,2140 4202.34,2140 4138.34,2204 3930.34,2204 3910.34,2224
SW on Top "Top-SW" (solid, remove dead copper, pour order 16): 4372,1960 4258.4,1960 4168,1873.71 4168,1686 4186.67,1672 4214.34,1672 4228,1658.34 4228,1564 4292,1564 4292,1798.34 4372,1878.34
+5V on Bottom "Bottom-+5V" (solid, remove dead copper, pour order 2): 3920,2205.66 3920,2118.34 3932,2106.34 3932,1926.34 3984,1874.34 3984,1774.34 3994.34,1764 4053.66,1764 4064,1774.34 4064,2046.34 4128,2110.34 4128,2478.34 4137.66,2488 4213.66,2488 4244,2518.34 4244,2584 4048,2584 4048,2245.66 4022.34,2220 3934.34,2220
GND on Bottom "Bottom-GND" (solid, remove dead copper, pour order 6): 979.71,3163 5063,3163 5063,937 937,937 937,3099.71 cw(c990,3110)
VIN on Bottom "Bottom-VIN" (solid, remove dead copper, pour order 10): 4307,1641 4373,1641 4373,1535 4307,1535
+3V3 on Bottom "Bottom-+3V3" (solid, remove dead copper, pour order 14): 4239,2333 4413,2333 4413,2183 4239,2183 4239,2324

## Keep-outs
Top:
  circle w16: c3600,1300 r100
  circle w12: c1600,3000 r100
  circle w12: c3600,2400 r100
  circle w12: c4550,3000 r100
  circle w12: c4800,1100 r100
  circle w12: c1550,1100 r100
  lines w10: 1968,2400 1968,2436
  lines w12: 1856,2552 1856,2400 1908,2400 ; 1856,2600 1856,2636 ; 1968,2548 1968,2584
Bottom:
  circle w16: c3600,1300 r100
  circle w12: c1600,3000 r100
  circle w12: c3600,2400 r100
  circle w12: c4550,3000 r100
  circle w12: c4800,1100 r100
  circle w12: c1550,1100 r100
  lines w10: 1968,2400 1968,2436
  lines w12: 1856,2400 1856,2436 ; 1856,2600 1856,2636 ; 1868,2400 1904,2400 ; 1968,2548 1968,2584
Keep-Out Layer:
  the board outline again, w10

## Silkscreen, mask and mechanical layers (free items; w line width, h text height)
Top Overlay:
  circle w12: c1840,2022 r8
  lines w8: 1948,2682 1948,2716 1956,2716 1956,2684 1984,2656 2012,2656 2012,2648 1982,2648 1948,2682
  lines w12: 2155,2810 2190,2775 2600,2775 ; 2820,2775 3260,2775 3300,2815 ; 2977,1264 3005,1292 3125,1292 ; 3405,2660 3450,2615 3500,2615 ; 3808,1292 4221,1292 4244,1269 ; 4285,2615 4355,2615 4400,2660 ; 4495,1905 4495,1445 4535,1405 ; 4495,2320 4495,2860 4535,2900 ; 4700,1225 4700,1205 4800,1205 4800,1225 ; 4700,3050 4700,3075 4800,3075 4800,3050
  lines w16: 3375,2800 3400,2850 3425,2800 ; 3375,2800 3400,2800 ; 3375,2800 3400,2825 ; 3400,2800 3400,2825 ; 3400,2800 3425,2800 ; 3400,2825 3425,2800 ; 3475,2850 3500,2850 ; 3475,2850 3500,2800 3525,2850 ; 3475,2850 3500,2825 ; 3500,2825 3525,2850 ; 3500,2825 3500,2850 ; 3500,2850 3525,2850
  text "MADE IN" at 2788,3186 h51
  text "ITALY" at 3211,3186 h51
  text "5V" at 4617.69,3047.6 h37.4 r0.01
  text "20" at 4277.39,2919.29 h47.6 r270.02
  text "AREF" at 1926.36,2918.46 h47.6 r270.02
  text "GND" at 2032.38,2917.88 h47.6 r270.02
  text "14" at 3677.39,2911.36 h47.6 r270.02
  text "15" at 3777.39,2911.36 h47.6 r270.02
  text "16" at 3877.39,2911.36 h47.6 r270.02
  text "17" at 3977.39,2911.36 h47.6 r270.02
  text "18" at 4077.39,2911.36 h47.6 r270.02
  text "19" at 4177.39,2911.36 h47.6 r270.02
  text "9" at 2527.41,2906.71 h47.6 r270.02
  text "8" at 2627.41,2906.71 h47.6 r270.02
  text "7" at 2777.41,2906.71 h47.6 r270.02
  text "6" at 2877.41,2906.71 h47.6 r270.02
  text "5" at 2977.41,2906.71 h47.6 r270.02
  text "4" at 3077.41,2906.71 h47.6 r270.02
  text "3" at 3177.41,2906.71 h47.6 r270.02
  text "2" at 3277.41,2906.71 h47.6 r270.02
  text "0" at 3477.41,2906.71 h47.6 r270.02
  text "SCL1" at 1734.37,2902.6 h47.6 r270.02
  text "SDA1" at 1826.37,2902.6 h47.6 r270.02
  text "21" at 4377.4,2903.43 h47.6 r270.02
  text "13" at 2127.39,2896.36 h47.6 r270.02
  text "12" at 2227.39,2896.36 h47.6 r270.02
  text "10" at 2427.39,2896.36 h47.6 r270.02
  text "1" at 3377.41,2890.85 h47.6 r270.02
  text "11" at 2327.4,2880.5 h47.6 r270.02
  text "22" at 4550,2875 h47.6
  text "TX0" at 3677.38,2796.88 h47.6 r270.02
  text "RX0" at 3777.38,2796.88 h47.6 r270.02
  text "TX2" at 4077.38,2796.88 h47.6 r270.02
  text "RX3" at 4177.38,2796.88 h47.6 r270.02
  text "SDA" at 4277.38,2796.88 h47.6 r270.02
  text "SCL" at 4377.38,2796.88 h47.6 r270.02
  text "TX1" at 3877.38,2781.02 h47.6 r270.02
  text "RX1" at 3977.38,2781.02 h47.6 r270.02
  text "24" at 4550,2775 h47.6
  text "TX" at 3377.39,2749.29 h47.6 r270.02
  text "RX" at 3477.39,2749.29 h47.6 r270.02
  text "PWM" at 2625,2742 h56.1
  text "26" at 4550,2675 h47.6
  text "28" at 4550,2575 h47.6
  text "30" at 4550,2475 h47.6
  text "31" at 4875,2475 h47.6
  text "32" at 4550,2375 h47.6
  text "33" at 4875,2375 h47.6
  text "DIGITAL" at 4468.81,2280.17 h56.1 r270.02
  text "34" at 4550,2275 h47.6
  text "35" at 4875,2275 h47.6
  text "1" at 3445.85,2187.51 h42.5 r0.01
  text "36" at 4550,2175 h47.6
  text "37" at 4875,2175 h47.6
  text "38" at 4550,2075 h47.6
  text "39" at 4875,2075 h47.6
  text "40" at 4550,1975 h47.6
  text "41" at 4875,1975 h47.6
  text "42" at 4550,1875 h47.6
  text "43" at 4850,1875 h47.6
  text "44" at 4550,1775 h47.6
  text "45" at 4850,1775 h47.6
  text "46" at 4550,1675 h47.6
  text "47" at 4875,1675 h47.6
  text "48" at 4550,1575 h47.6
  text "49" at 4875,1575 h47.6
  text "Arduino" at 3358,1484 h68
  text "50" at 4550,1475 h47.6
  text "51" at 4875,1475 h47.6
  text "RESET" at 2281.35,1390.05 h47.6 r270.02
  text "IOREF" at 2181.35,1382.12 h47.6 r270.02
  text "52" at 4550,1375 h47.6
  text "53" at 4875,1375 h47.6
  text "DUE" at 3482,1374 h76.5
  text "Arduino.cc" at 3787,1349 h55.25
  text "CANRX" at 4483.96,1319.6 h34 r270.02
  text "CANTX" at 4578.96,1319.6 h34 r270.02
  text "3V3" at 2381.38,1294.88 h47.6 r270.02
  text "DAC0" at 4283.97,1285.62 h34 r270.02
  text "DAC1" at 4383.98,1274.29 h34 r270.02
  text "10" at 4082.39,1256.36 h47.6 r270.02
  text "ANALOG   IN" at 3151,1254 h56.1
  text "11" at 4174.4,1240.5 h47.6 r270.02
  text "0" at 2982.41,1216.71 h47.6 r270.02
  text "2" at 3182.41,1216.71 h47.6 r270.02
  text "3" at 3282.41,1216.71 h47.6 r270.02
  text "4" at 3382.41,1216.71 h47.6 r270.02
  text "5" at 3477.41,1216.71 h47.6 r270.02
  text "6" at 3577.41,1216.71 h47.6 r270.02
  text "7" at 3682.41,1216.71 h47.6 r270.02
  text "8" at 3882.41,1216.71 h47.6 r270.02
  text "9" at 3982.41,1216.71 h47.6 r270.02
  text "1" at 3072.41,1200.85 h47.6 r270.02
  text "GND" at 4840,1200 h47.6
  text "5V" at 2460,1169 h47.6
  text "GND" at 2580,1169 h47.6
  text "VIN" at 2752,1169 h47.6
ReferenceLC:
  text "PC2" at 3888,1684 h34
  text "PC1" at 1854,1214 h34

## Text inside footprints (layer, text, board x,y; h text height)
IC4: Top Overlay "3" at 4034,2214.99 h49.6 r270; Top Overlay "4" at 4304,2181 h49.6 r270; Top Overlay "1" at 4034,2391.92 h49.6 r270; Top Overlay "2" at 4033.63,2306.81 h49.6 r270
IC6: Top Overlay "1" at 1593.95,1847 h49.6
J3: Top Overlay "PCB" at 1005.01,1685 h62 r270; Bottom Solder "Modify SOLDER PADS" at 905.01,1624.99 h49.6 r270
USB1: Top Overlay "PCB" at 961.01,2342 h62 r270; Bottom Solder "Modify SOLDER PADS" at 905.01,2249.99 h49.6 r270